# Altium PCB Timermodule.PcbDoc
Units mm, origin at the board's own origin, x right, y up, seen from the top; angles counter-clockwise.
Board outline 152.4 x 101.6 mm, 2 copper layers (Top Layer, Bottom Layer); 57 components, 52 nets, 169 pads, 0 vias.
Unrouted connection lines stored in the file: 93.
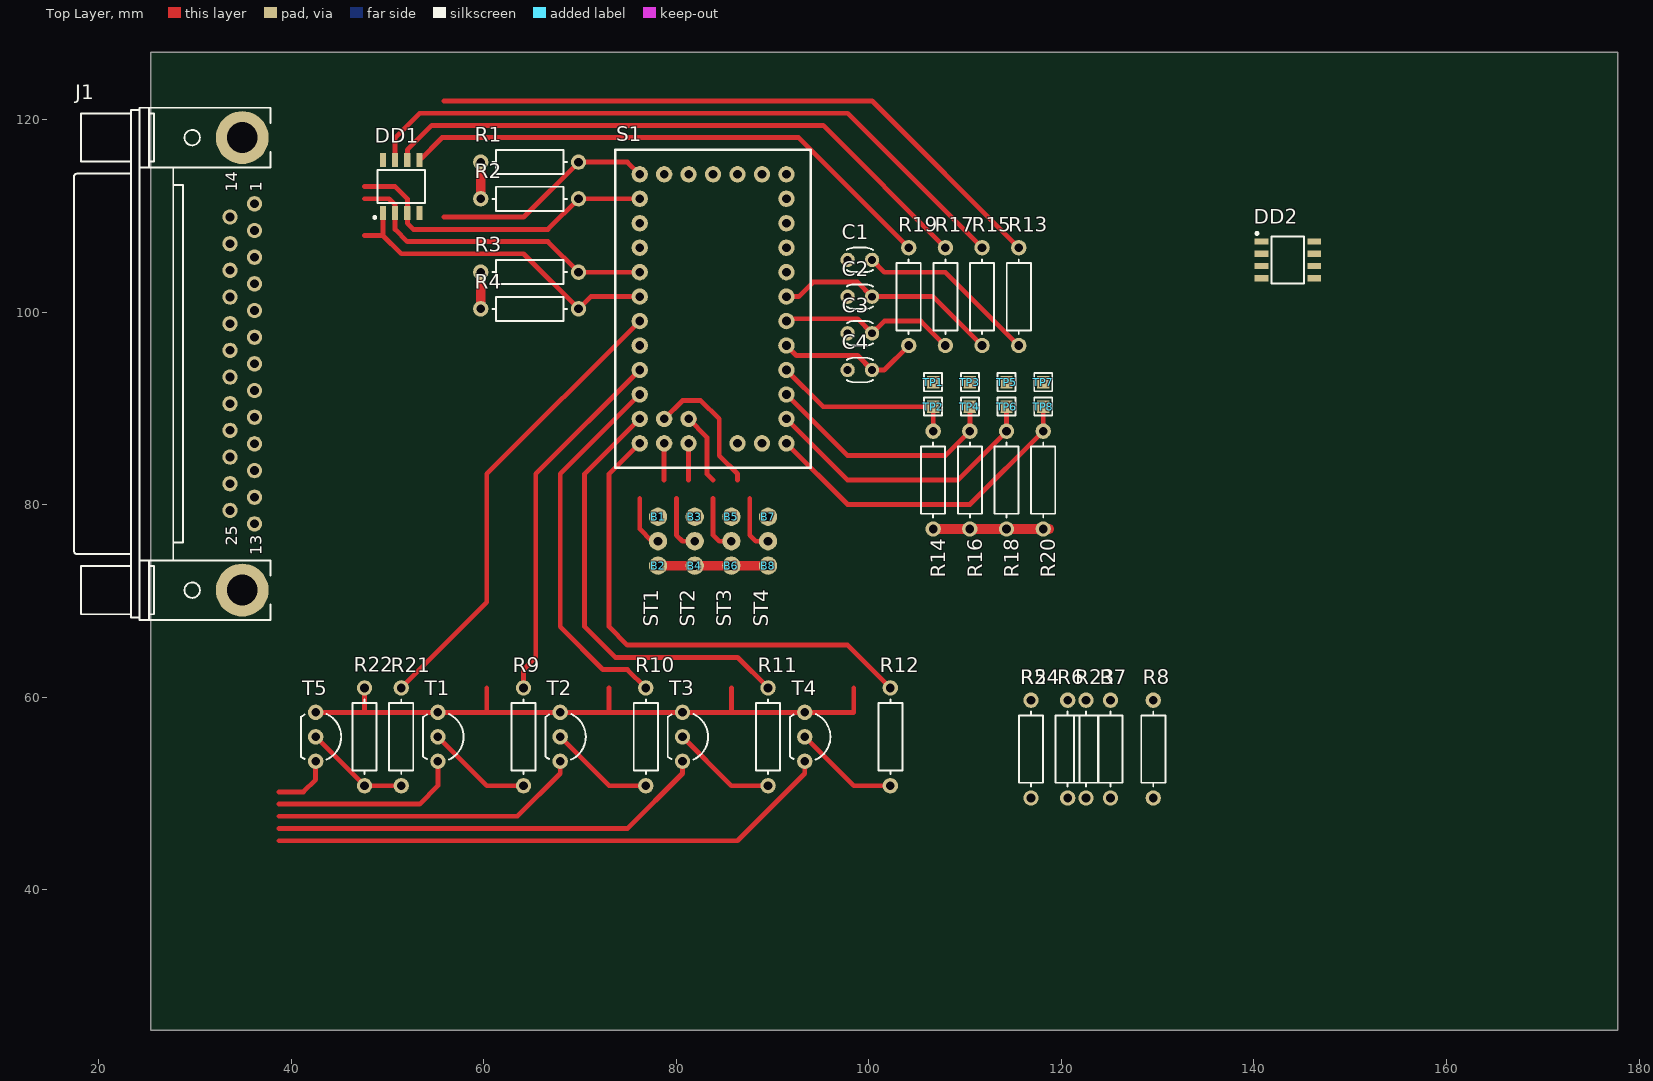
[diagram p0: Top Layer view]
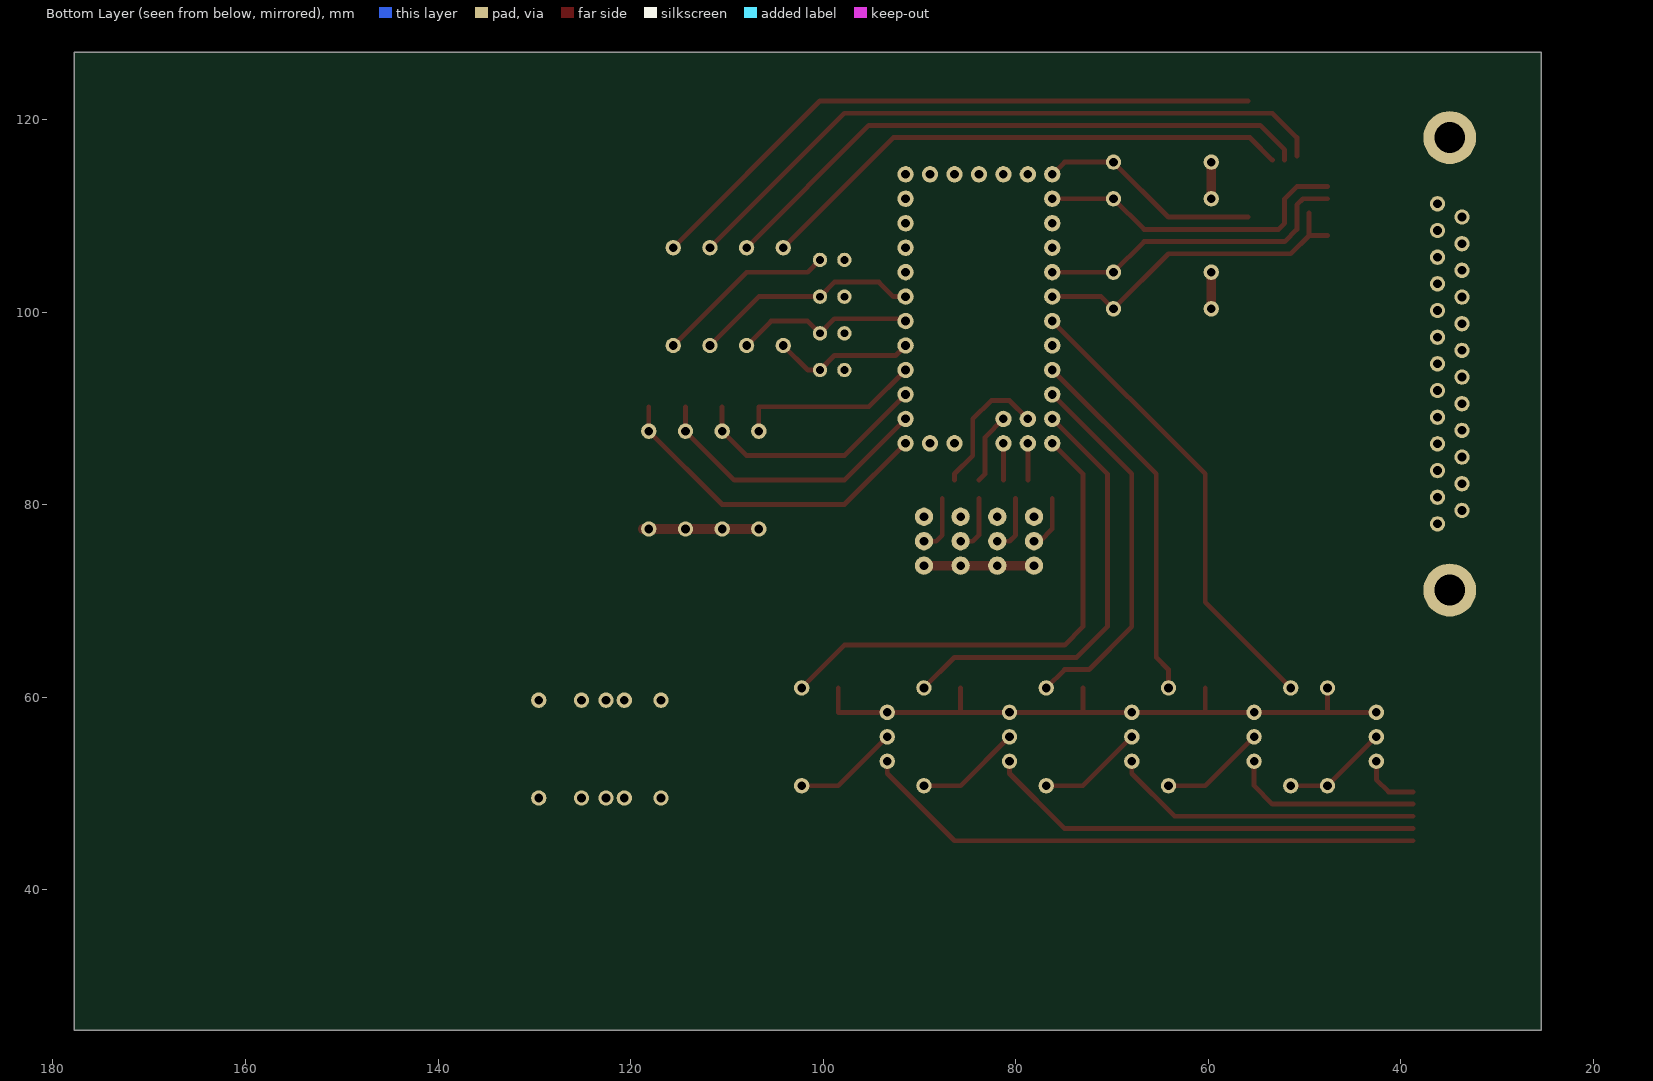
[diagram p1: Bottom Layer view, seen from below]
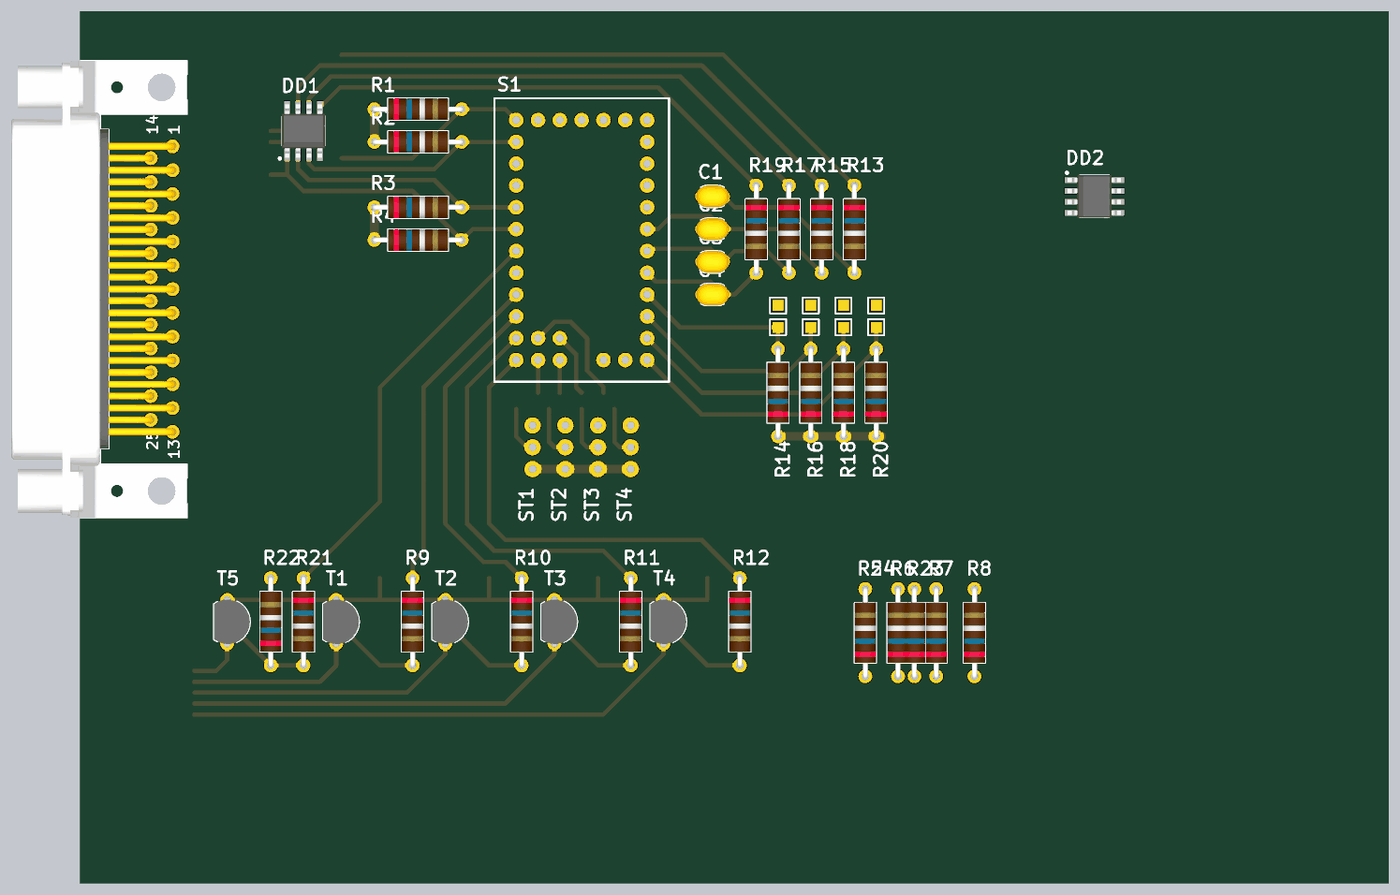
[diagram p2: 3D render of the assembled board from above, using the file's embedded part models]

## Layer stack, top to bottom
Top Solder: solder mask 0.0102, Solder Resist, Dk 3.5
Top Layer: signal copper 0.0356
Dielectric 1: dielectric 0.32, FR-4, Dk 4.8
Bottom Layer: signal copper 0.0356
Bottom Solder: solder mask 0.0102, Solder Resist, Dk 3.5

## Board outline
25.4,25.4 177.8,25.4 177.8,127 25.4,127

## Design rules (kind name [scope] priority, off if disabled: settings)
Clearance [All] p1: gap=0.25
PolygonConnect [All] p1: connectstyle=Relief reliefconductorwidth=0.254 reliefentries=4 polygonreliefangle="90 Angle" airgapwidth=0.254
RoutingVias [All] p1: holewidth=0.711 width=1.27 viastyle="Through Hole" minholewidth=0.711 minwidth=1.27 maxholewidth=0.711 maxwidth=1.27
SolderMaskExpansion [All] p1: expansion=0.102
Width [All] p1: maxlimit=2 minlimit=0.254 preferedwidth=1
29 further rules are at their usual default settings.

## Classes and differential pairs
component class TimerModule: B1 B2 B3 B4 B5 B6 B7 B8 C1 C2 C3 C4 J1 R1 R2 R3 R4 R9 R10 R11 R12 R13 R14 R15 R16 R17 R18 R19 R20 R21 R22 R23 R24 ST1 ST2 ST3 ST4 T1 T2 T3 T4 T5 TP1 TP2 TP3 TP4 TP5 TP6 TP7 TP8

## Components (designator, comment, footprint, x,y, rotation, side; value= is the part's Value field where it differs from the comment)
B1 "Plated Hole" MTG300_700 78.105,78.74 r0 top
B2 "Plated Hole" MTG300_700 78.105,73.66 r0 top
B3 "Plated Hole" MTG300_700 81.915,78.74 r0 top
B4 "Plated Hole" MTG300_700 81.915,73.66 r0 top
B5 "Plated Hole" MTG300_700 85.725,78.74 r0 top
B6 "Plated Hole" MTG300_700 85.725,73.66 r0 top
B7 "Plated Hole" MTG300_700 89.535,78.74 r0 top
B8 "Plated Hole" MTG300_700 89.535,73.66 r0 top
C1 "2.2uF" CAPRR254-254X381X508 99.06,105.41 r0 top
C2 "2.2uF" CAPRR254-254X381X508 99.06,101.6 r0 top
C3 "2.2uF" CAPRR254-254X381X508 99.06,97.79 r0 top
C4 "2.2uF" CAPRR254-254X381X508 99.06,93.98 r0 top
DD1 "SP721ABG" SOIC127P594X363-8N 51.435,113.03 r90 top
DD2 "SP721ABG" SOIC127P594X363-8N 143.51,105.41 r0 top
J1 "D-Sub" AMPHENOL_L717DFB25P1ATN 34.925,94.615 r90 top
R1 "100K" RES_ARCOL_RCC025 64.77,115.57 r0 top
R2 "100K" RES_ARCOL_RCC025 64.77,111.76 r0 top
R3 "100K" RES_ARCOL_RCC025 64.77,104.14 r0 top
R4 "100K" RES_ARCOL_RCC025 64.77,100.33 r0 top
R5 "100K" RES_ARCOL_RCC025 116.84,54.61 r90 top
R6 "100K" RES_ARCOL_RCC025 120.65,54.61 r90 top
R7 "100K" RES_ARCOL_RCC025 125.095,54.61 r90 top
R8 "100K" RES_ARCOL_RCC025 129.54,54.61 r90 top
R9 "1K" RES_ARCOL_RCC025 64.135,55.88 r270 top
R10 "1K" RES_ARCOL_RCC025 76.835,55.88 r270 top
R11 "1K" RES_ARCOL_RCC025 89.535,55.88 r270 top
R12 "1K" RES_ARCOL_RCC025 102.235,55.88 r270 top
R13 "100K" RES_ARCOL_RCC025 115.57,101.6 r270 top
R14 "100K" RES_ARCOL_RCC025 106.68,82.55 r90 top
R15 "100K" RES_ARCOL_RCC025 111.76,101.6 r270 top
R16 "100K" RES_ARCOL_RCC025 110.49,82.55 r90 top
R17 "100K" RES_ARCOL_RCC025 107.95,101.6 r270 top
R18 "100K" RES_ARCOL_RCC025 114.3,82.55 r90 top
R19 "100K" RES_ARCOL_RCC025 104.14,101.6 r270 top
R20 "100K" RES_ARCOL_RCC025 118.11,82.55 r90 top
R21 "1K" RES_ARCOL_RCC025 51.435,55.88 r270 top
R22 "100K" RES_ARCOL_RCC025 47.625,55.88 r90 top
R23 "1K" RES_ARCOL_RCC025 122.555,54.61 r90 top
R24 "100K" RES_ARCOL_RCC025 116.84,54.61 r90 top
S1 "Iskra" Iskra 76.2,114.3 r0 top
ST1 "Plated Hole" MTG300_700 78.105,76.2 r0 top
ST2 "Plated Hole" MTG300_700 81.915,76.2 r0 top
ST3 "Plated Hole" MTG300_700 85.725,76.2 r0 top
ST4 "Plated Hole" MTG300_700 89.535,76.2 r0 top
T1 "2N4403" TO-92AA-P254 55.245,55.88 r270 top
T2 "2N4403" TO-92AA-P254 67.945,55.88 r270 top
T3 "2N4403" TO-92AA-P254 80.645,55.88 r270 top
T4 "2N4403" TO-92AA-P254 93.345,55.88 r270 top
T5 "2N4403" TO-92AA-P254 42.545,55.88 r270 top
TP1 "Test Point" TPS127 106.68,92.71 r0 top
TP2 "Test Point" TPS127 106.68,90.17 r0 top
TP3 "Test Point" TPS127 110.49,92.71 r0 top
TP4 "Test Point" TPS127 110.49,90.17 r0 top
TP5 "Test Point" TPS127 114.3,92.71 r0 top
TP6 "Test Point" TPS127 114.3,90.17 r0 top
TP7 "Test Point" TPS127 118.11,92.71 r0 top
TP8 "Test Point" TPS127 118.11,90.17 r0 top

## Footprints (in the part's own frame and the unit in brackets; to place one, negate y for a bottom-side part, rotate by r counter-clockwise, add the part's x,y. Pads: shape width x height; smd on the part's side, far side on the other; paste and mask are expansions set on the pad)
AMPHENOL_L717DFB25P1ATN [mm] "Right Angled D-Sub 25 Male Contacts with Metal Bracket and Front Female Screwlock (UNC4-40)"
  round 1.6 hole 0.9: 1(16.62,-1.27) 2(13.85,-1.27) 3(11.08,-1.27) 4(8.31,-1.27) 5(5.54,-1.27) 6(2.77,-1.27) 7(0,-1.27) 8(-2.77,-1.27) 9(-5.54,-1.27) 10(-8.31,-1.27) 11(-11.08,-1.27) 12(-13.85,-1.27) 13(-16.62,-1.27) 14(15.25,1.27) 15(12.48,1.27) 16(9.71,1.27) 17(6.94,1.27) 18(4.17,1.27) 19(1.4,1.27) 20(-1.37,1.27) 21(-4.14,1.27) 22(-6.91,1.27) 23(-9.68,1.27) 24(-12.45,1.27) 25(-15.22,1.27)
  round 5.5 hole 3.2: 26(-23.5,0) 27(23.5,0)
  silkscreen extent -26.6,-2.93 26.6,17.47, body extent -26.6,-2.93 26.6,17.47, height 13.45
CAPRR254-254X381X508 [mm] "Capacitor Radial Rounded, Pin spacing 2.54mm - Body With 2.54mm X Body Length 3.81mm X Body Height 5.08mm"
  round 1.5 hole 0.8: 1(-1.27,0) 2(1.27,0)
  silkscreen extent -1.35,-1.27 1.35,1.27, body extent -1.9,-1.27 1.91,1.27, height 5.08
Iskra [mm]
  round 1.7 hole 0.9: 1(0,0) 2(0,-2.54) 3(0,-5.08) 4(0,-7.62) 5(0,-10.16) 6(0,-12.7) 7(0,-15.24) 8(0,-17.78) 9(0,-20.32) 10(0,-22.86) 11(0,-25.4) 12(0,-27.94) 13(2.54,-25.4) 14(5.08,-25.4) 15(2.54,-27.94) 16(5.08,-27.94) 17(10.16,-27.94) 18(12.7,-27.94) 19(15.24,-27.94) 20(15.24,-25.4) 21(15.24,-22.86) 22(15.24,-20.32) 23(15.24,-17.78) 24(15.24,-15.24) 25(15.24,-12.7) 26(15.24,-10.16) 27(15.24,-7.62) 28(15.24,-5.08) 29(15.24,-2.54) 30(15.24,0) 31(12.7,0) 32(10.16,0) 33(7.62,0) 34(5.08,0) 35(2.54,0)
  silkscreen extent -2.54,-30.48 17.78,2.54
MTG300_700 [mm] "Plated Through Hole: Hole Dia.=3.0mm Pad Dia.=7.0mm"
  round 1.9 hole 0.9: 1(0,0)
RES_ARCOL_RCC025 [mm] "Resistor, Axial, Pad spacing 10.16 mm - Body Lengh 6.3m X Body Diameter 2.4mm"
  round 1.6 hole 0.9: 1(-5.08,0) 2(5.08,0)
  silkscreen extent -3.88,-1.25 3.88,1.25, body extent -5.38,-1.25 5.38,1.25, height 2.5
SOIC127P594X363-8N [mm] "SOIC, 1.27mm pitch; 8  pin, 3.91mm W X 4.88mm L, IPC Medium Density"
  rect 1.45x0.65 smd: 1(-2.75,1.905) 2(-2.75,0.635) 3(-2.75,-0.635) 4(-2.75,-1.905) 5(2.75,-1.905) 6(2.75,-0.635) 7(2.75,0.635) 8(2.75,1.905)
  silkscreen extent -3.32,-2.45 1.7,2.87, body extent -3.1,-2.5 3.1,2.5, height 3.63
TO-92AA-P254 [mm] "TO-92 (TO226), Pitch 2.54mm, Flat Index, 3 In-Line, Bent Leads, Body Dia. 5.3mm"
  round 1.6 hole 0.9: 1(-2.54,0) 2(0,0) 3(2.54,0)
  silkscreen extent -2.36,-1.53 2.37,2.66, body extent -2.81,-1.53 2.81,2.64, height 9.33
TPS127 [mm] "1.27 x  1.27mm SMD Test Point Area"
  rect 1.27x1.27 smd paste-1.27: 1(0,0)
  silkscreen extent -0.94,-0.94 0.94,0.94

## Part data
B1 B2 B3 B4 B5 B6 B7 B8 ST1 ST2 ST3 ST4: library part PLATED_HOLE3.0_PAD7.0, "Single Terminal Socket"
C1 C2 C3 C4: library part CCR_15PF_100V_5%_COG_254-254X381X508, "Non-polarised capacitor"
J1: library part AMPHENOL_L717DFB25P1ATN, "Connector D-sub 25 Male"
R1 R2 R3 R4 R5 R6 R7 R8 R9 R10 R11 R12 R13 R14 R15 R16 R17 R18 R19 R20 R21 R22 R23 R24: library part RCF_5K1_5%_0.25W_+10-6PPM_ARCOL_RCC025, "Resistor - 5%"
S1: library part Iskra_Holder
T1 T2 T3 T4 T5: library part 2N3906RL1G, "PNP Transistor"
TP1 TP2 TP3 TP4 TP5 TP6 TP7 TP8: library part SMD_PAD_1.27X1.27MM

## Nets (pads, with @x,y where several pads share a name; then routed paths per layer and width w, separated by ;. In a path a pad name is that pad's centre, name@x,y a point inside that pad or via, vN(x,y) a via of type N, cw(c..) or ccw(c..) an arc to the next point about the centre after c; other vN are vias at no path point)
GND: B2.1 B4.1 B6.1 B8.1 C1.1 C2.1 C3.1 C4.1 DD1.4 DD2.4 R1.1 R2.1 R3.1 R4.1 R14.1 R16.1 R18.1 R20.1 R24.1 S1.4 S1.18 S1.29 S1.31 | length 30.5
  Top Layer w1: R4.1 R3.1 ; R2.1 R1.1 ; B2.1 B4.1 B6.1 B8.1 ; R14.1@107.315,77.47 111.125,77.47 114.935,77.47 R20.1@118.745,77.47
NetB1_1: B1.1 B3.1 B5.1 B7.1 DD1.8 DD2.8 R5.2 R6.2 R7.2 R8.2 R22.2 S1.30 T1.1 T2.1 T3.1 T4.1 T5.1 TP1.1 TP3.1 TP5.1 TP7.1 | length 68.6
  Top Layer w0.5: T5.1 47.625,58.42 ; R22.2 47.625,58.42 ; 60.325,60.96 60.325,58.42 ; 73.025,60.96 73.025,58.42 ; 85.725,60.96 85.725,58.42 ; 98.425,60.96 98.425,58.42 T4.1 85.725,58.42 ; 47.625,58.42 T1.1 60.325,58.42 ; 60.325,58.42 T2.1 73.025,58.42 ; 73.025,58.42 T3.1 85.725,58.42
NetC1_2: C1.2 R13.2 S1.26 | length 18.9
  Top Layer w0.5: C1.2 101.6,104.14 107.95,104.14 R13.2
NetC2_2: C2.2 R15.2 S1.25 | length 23.7
  Top Layer w0.5: S1.25 92.71,101.6 94.214,103.104 98.826,103.104 C2.2 106.68,101.6 R15.2
NetC3_2: C3.2 R17.2 S1.24 | length 18.8
  Top Layer w0.5: S1.24 91.674,99.294 98.826,99.294 C3.2 101.6,99.06 105.41,99.06 R17.2
NetC4_2: C4.2 R19.2 S1.23 | length 14.8
  Top Layer w0.5: S1.23 92.476,95.484 98.826,95.484 C4.2 101.6,93.98 R19.2
NetDD1_1: DD1.1 J1.11 R4.2 S1.6 | length 34.6
  Top Layer w0.5: 47.625,107.95 49.53,107.95 ; DD1.1 49.53,107.95 ; S1.6 71.12,101.6 R4.2 64.135,106.045 51.435,106.045 49.53,107.95
NetDD1_2: DD1.2 J1.7 R3.2 S1.5 | length 33.2
  Top Layer w0.5: 47.625,111.76 50.165,111.76 50.8,111.125 DD1.2 50.8,108.585 52.07,107.315 66.675,107.315 R3.2 S1.5
NetDD1_3: DD1.3 J1.10 R2.2 S1.2 | length 33.2
  Top Layer w0.5: 47.625,113.03 50.8,113.03 52.07,111.76 DD1.3 52.07,109.22 52.705,108.585 66.675,108.585 R2.2 S1.2
NetDD1_5: DD1.5 J1.5 R19.1 | length 56.5
  Top Layer w0.5: DD1.5 55.67,118.11 92.71,118.11 R19.1
NetDD1_6: DD1.6 J1.6 R17.1 | length 63.3
  Top Layer w0.5: DD1.6 52.07,116.84 54.61,119.38 95.25,119.38 R17.1
NetDD1_7: DD1.7 J1.4 R15.1 | length 69.7
  Top Layer w0.5: DD1.7@50.8,116.205 50.8,118.11 53.34,120.65 97.79,120.65 R15.1
NetDD2_7: DD2.7 J1.3 R13.1 | length 66
  Top Layer w0.5: 55.88,121.92 100.33,121.92 R13.1
NetJ1_1: J1.1 T5.3 | length 6.2
  Top Layer w0.5: 38.735,50.165 41.275,50.165 42.545,51.435 T5.3
NetJ1_2: J1.2
NetJ1_8: J1.8
NetJ1_9: J1.9
NetJ1_12: J1.12
NetJ1_13: J1.13
NetJ1_14: J1.14
NetJ1_15: J1.15
NetJ1_16: J1.16
NetJ1_17: J1.17
NetJ1_18: J1.18
NetJ1_19: J1.19 T3.3 | length 45.5
  Top Layer w0.5: 38.735,46.355 74.93,46.355 80.645,52.07 T3.3
NetJ1_20: J1.20 T2.3 | length 32.3
  Top Layer w0.5: 38.735,47.625 63.5,47.625 67.945,52.07 T2.3
NetJ1_21: J1.21 T1.3 | length 19.8
  Top Layer w0.5: 38.735,48.895 53.34,48.895 55.245,50.8 T1.3
NetJ1_22: J1.22
NetJ1_23: J1.23
NetJ1_24: J1.24
NetJ1_25: J1.25
NetR1_2: R1.2 R23.1 S1.1 | length 23.2
  Top Layer w0.5: 55.88,109.855 64.135,109.855 R1.2 74.93,115.57 S1.1
NetR5_1: R5.1 R9.2 T1.2 | length 11
  Top Layer w0.5: T1.2 60.325,50.8 R9.2
NetR6_1: R6.1 R10.2 T2.2 | length 11
  Top Layer w0.5: T2.2 73.025,50.8 R10.2
NetR7_1: R7.1 R11.2 T3.2 | length 11
  Top Layer w0.5: T3.2 85.725,50.8 R11.2
NetR8_1: R8.1 R12.2 T4.2 | length 11
  Top Layer w0.5: T4.2 98.425,50.8 R12.2
NetR9_1: R9.1 S1.9 | length 38
  Top Layer w0.5: R9.1 64.135,62.865 65.405,64.135 65.405,83.185 S1.9
NetR10_1: R10.1 S1.10 | length 39.1
  Top Layer w0.5: S1.10 67.945,83.185 67.945,67.31 72.39,62.865 74.93,62.865 R10.1
NetR11_1: R11.1 S1.11 | length 45.6
  Top Layer w0.5: S1.11 70.485,83.185 70.485,71.12 70.485,67.31 73.66,64.135 86.36,64.135 R11.1
NetR12_1: R12.1 S1.12 | length 52.2
  Top Layer w0.5: S1.12 73.025,83.185 73.025,71.12 73.025,67.31 74.93,65.405 97.79,65.405 R12.1
NetR14_2: R14.2 S1.22 TP2.1 | length 19.4
  Top Layer w0.5: S1.22 95.25,90.17 TP2.1 R14.2
NetR16_2: R16.2 S1.21 TP4.1 | length 25.3
  Top Layer w0.5: S1.21 97.79,85.09 107.95,85.09 R16.2 TP4.1
NetR18_2: R18.2 S1.20 TP6.1 | length 30.1
  Top Layer w0.5: S1.20 97.79,82.55 109.22,82.55 R18.2 TP6.1
NetR20_2: R20.2 S1.19 TP8.1 | length 35
  Top Layer w0.5: S1.19 97.79,80.01 110.49,80.01 R20.2 TP8.1
NetR21_1: R21.1 S1.7 | length 48.4
  Top Layer w0.5: R21.1 60.325,69.85 60.325,83.185 S1.7
NetR21_2: R21.2 R22.1 T5.2 | length 11
  Top Layer w0.5: T5.2 R22.1 R21.2
NetR23_2: R23.2 R24.2
NetS1_13: S1.13 ST4.1 | length 20.4
  Top Layer w0.5: S1.13 80.645,90.805 82.55,90.805 84.455,88.9 84.455,85.09 86.36,83.185 86.36,82.55 ; 87.63,80.645 87.63,76.835 88.265,76.2 ST4.1
NetS1_14: S1.14 ST3.1 | length 14
  Top Layer w0.5: S1.14@81.915,88.9 S1.14 83.185,86.995 83.185,83.185 83.82,82.55 ; 83.82,80.645 83.82,76.835 84.455,76.2 ST3.1
NetS1_16: S1.16 ST1.1 | length 9.4
  Top Layer w0.5: 76.2,80.645 76.2,77.47 77.47,76.2 ST1.1 ; 81.28,82.55 S1.16
NetS1_17: S1.17 ST2.1 | length 6
  Top Layer w0.5: 80.01,80.645 80.01,76.835 80.645,76.2 ST2.1
NetT4_3: T4.3 | length 58.8
  Top Layer w0.5: 38.735,45.085 86.36,45.085 93.345,52.07 T4.3
pads on no net: DD2.1 DD2.2 DD2.3 DD2.5 DD2.6 J1.26 J1.27 S1.3 S1.8 S1.15 S1.27 S1.28 S1.32 S1.33 S1.34 S1.35
copper on no net: | length 3.8
  Top Layer w0.5: 78.74,82.55 78.74,86.36

## Text inside footprints (layer, text, board x,y; h text height)
J1: Top Overlay "25" at 34.417,75.728 h1.2 r90; Top Overlay "13" at 36.925,74.715 h1.2 r90; Top Overlay "14" at 34.417,112.486 h1.2 r90; Top Overlay "1" at 36.957,112.486 h1.2 r90